# Altium PCB PCB_main.PcbDoc
Units mm, origin at the board's own origin, x right, y up, seen from the top; angles counter-clockwise.
Board outline 50 x 39 mm, 4 copper layers (Top Signal, GND Polygon, Power_Polygon, Bottom Signal), stack 1.174 mm thick; 53 components, 62 nets, 231 pads, 86 vias.
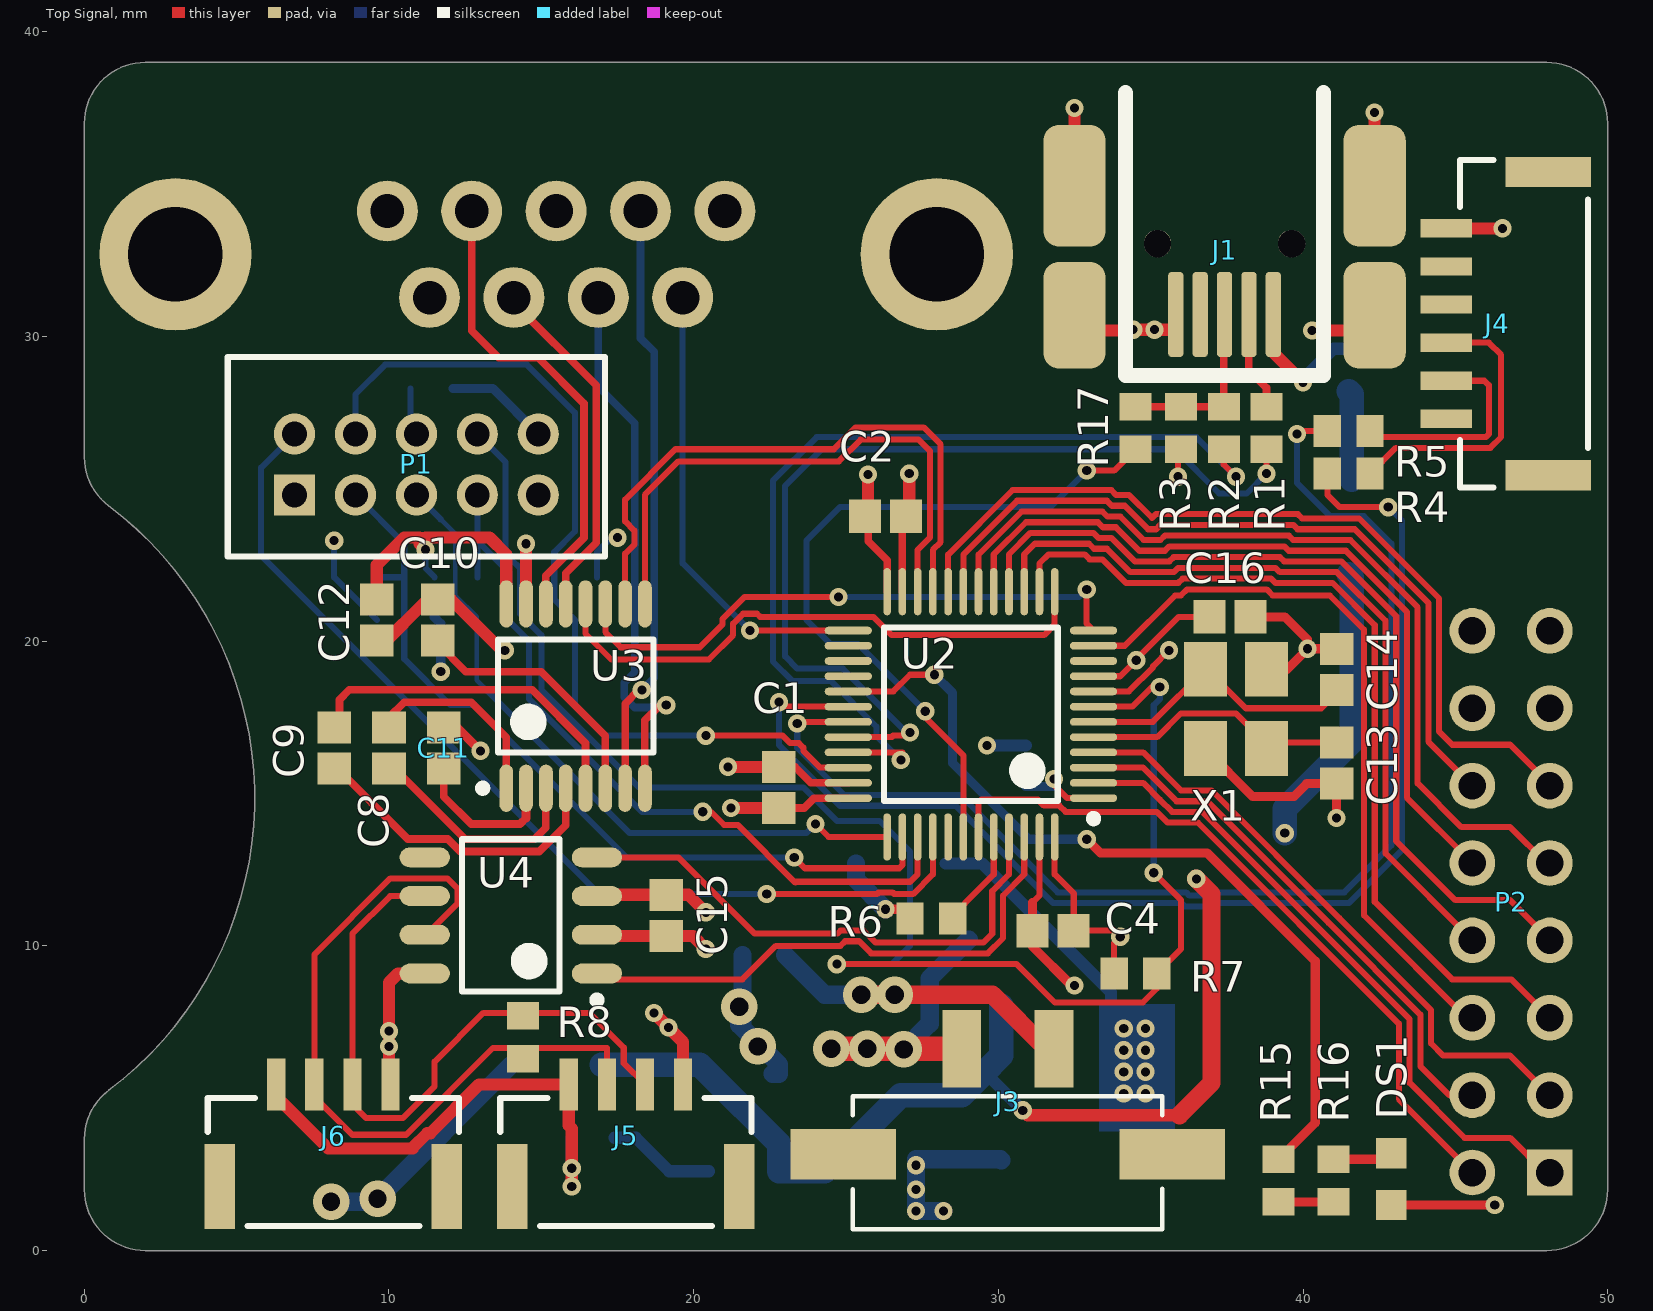
[diagram p0: Top Signal view]
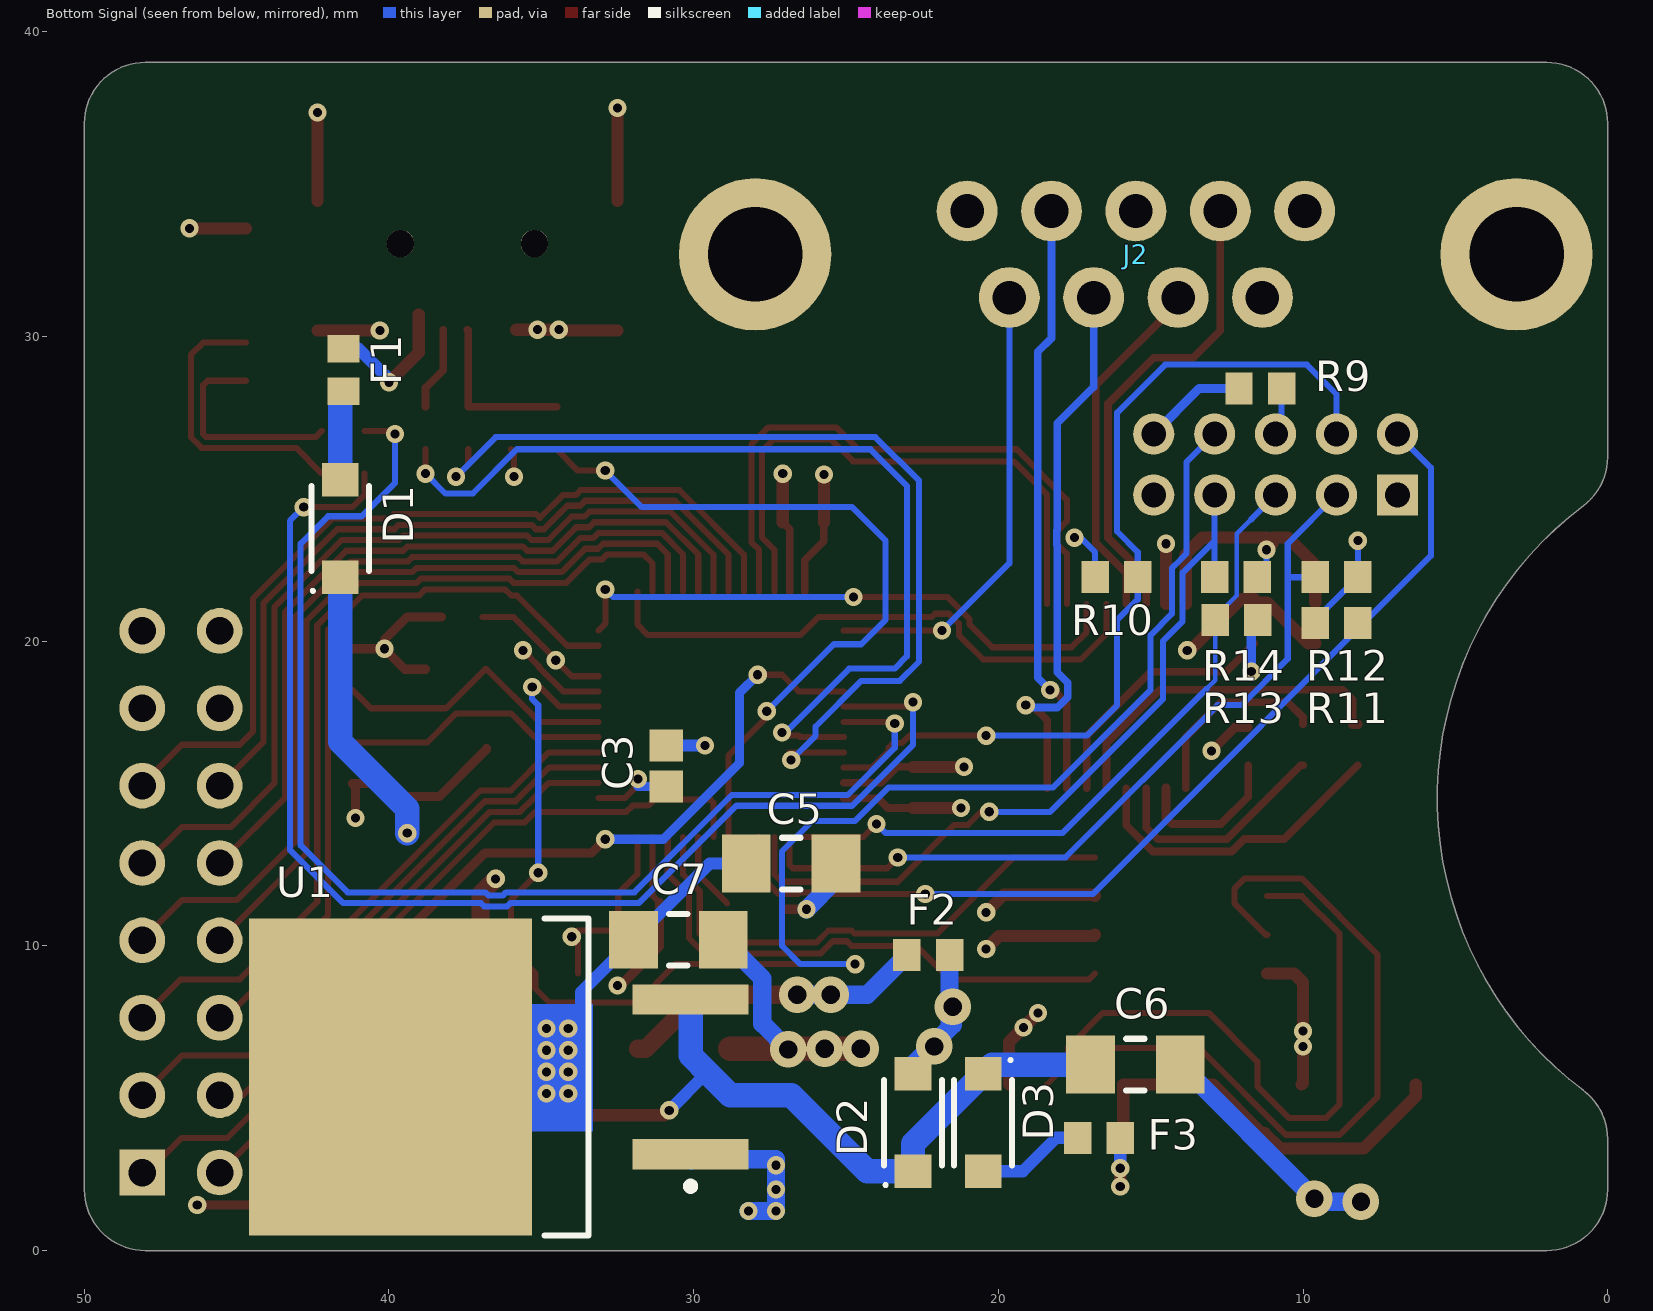
[diagram p1: Bottom Signal view, seen from below]
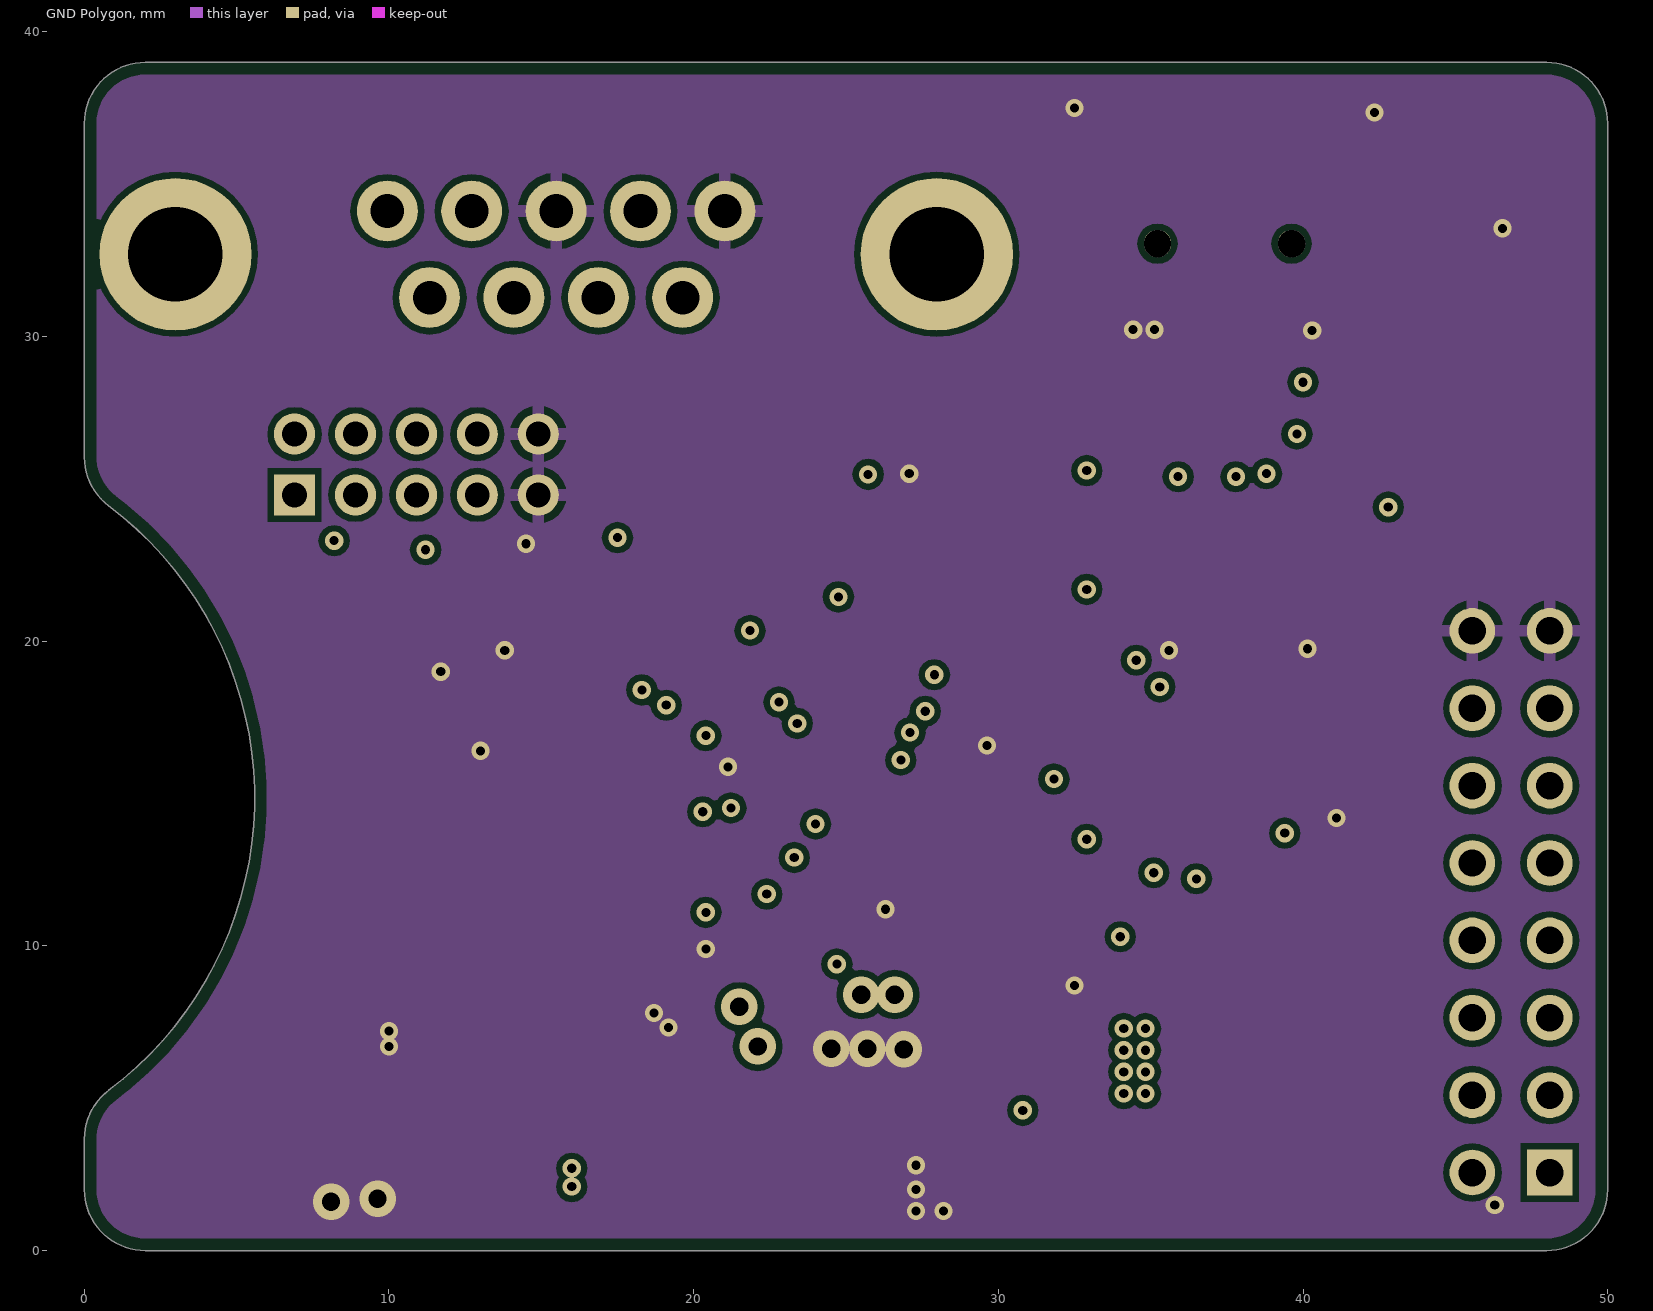
[diagram p2: GND Polygon]
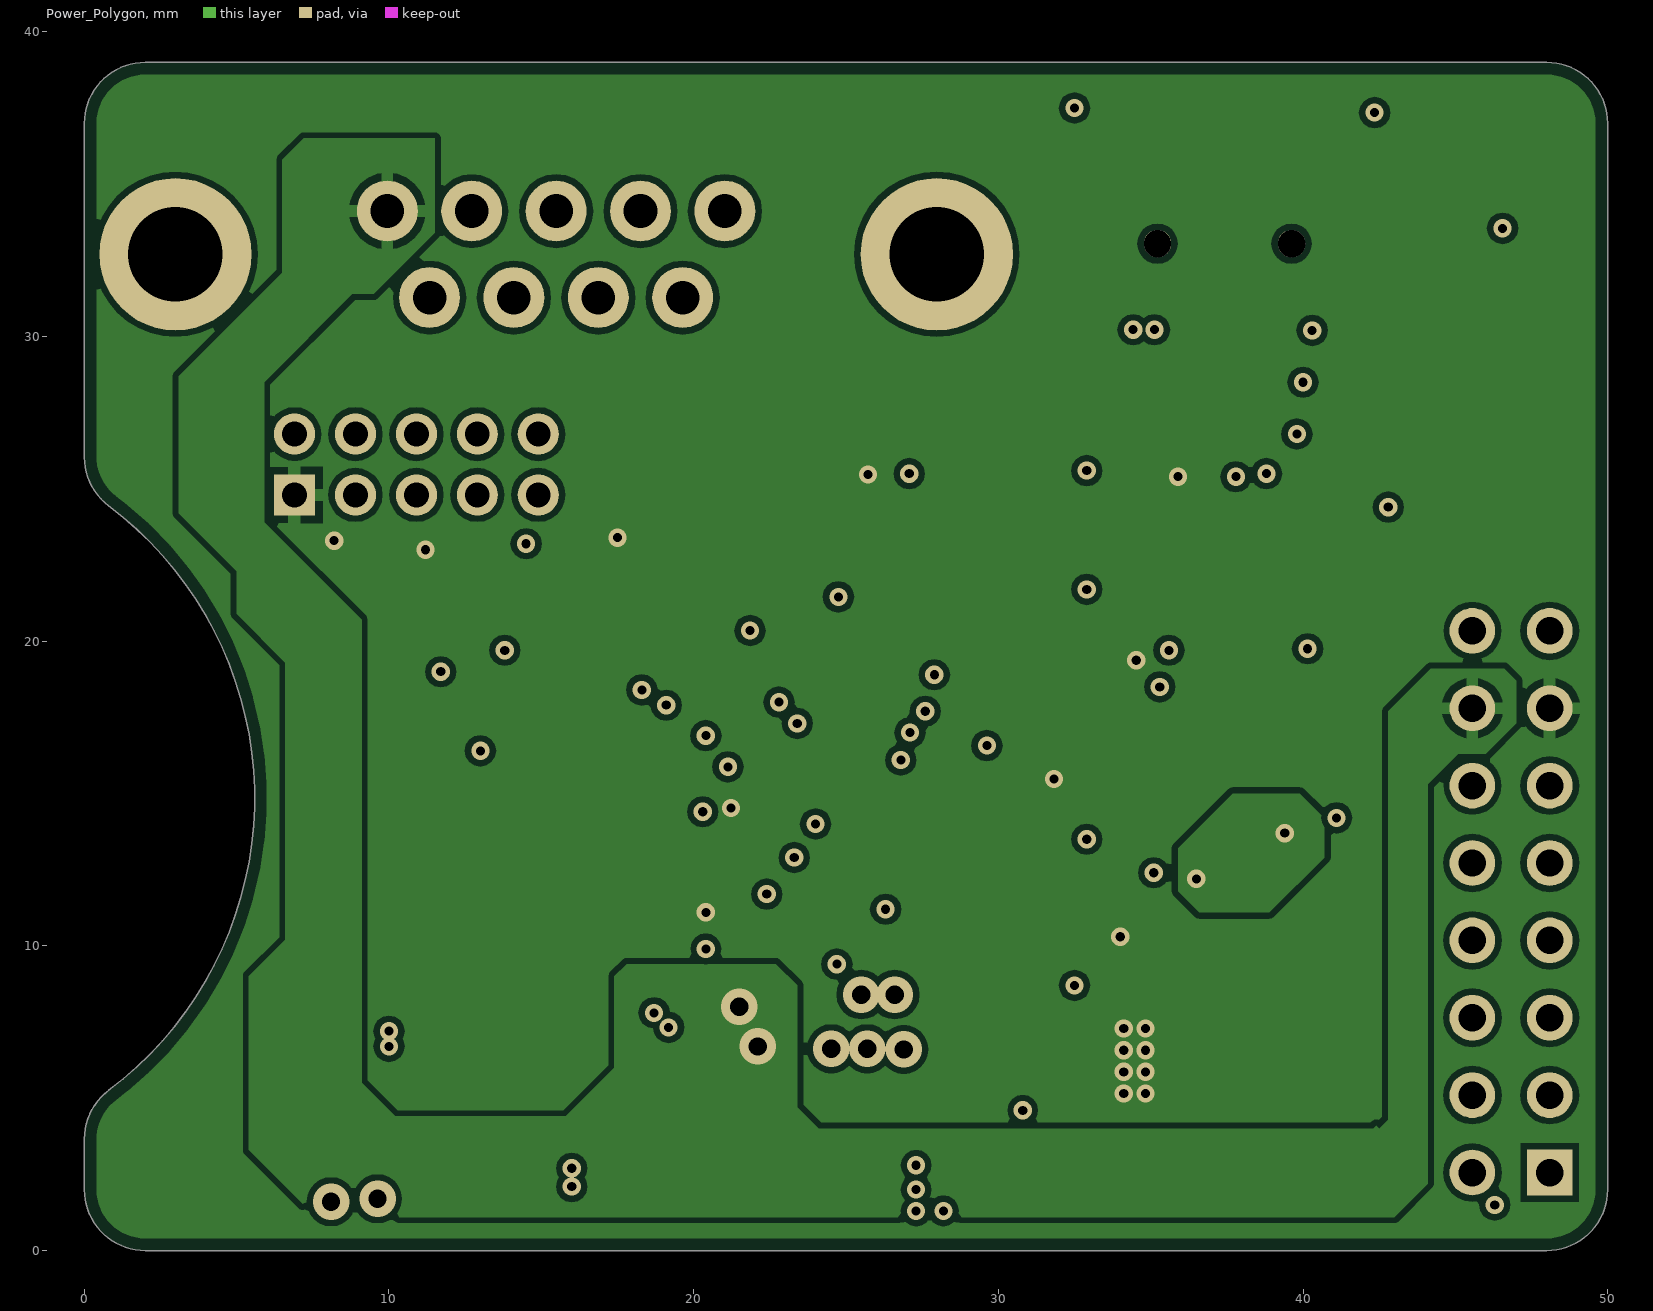
[diagram p3: Power_Polygon]

## Layer stack, top to bottom
Top Solder: solder mask 0.0102, Solder Resist, Dk 3.5
Top Signal: signal copper 0.0356
Dielectric 1: core 0.65, FR-4, Dk 4.8
GND Polygon: signal copper 0.036
Dielectric 3: prepreg 0.127, Dk 4.2
Power_Polygon: signal copper 0.036
Dielectric 4: core 0.254, FR-4, Dk 4.2
Bottom Signal: signal copper 0.0356
Bottom Solder: solder mask 0.0102, Solder Resist, Dk 3.5

## Board outline
0,2 0,3.658 cw(c2,3.658) 0.799,5.256 ccw(c-6.41,14.85) 0.799,24.444 cw(c2,26.042) 0,26.042 0,37 cw(c2,37) 2,39 48,39 cw(c48,37) 50,37 50,2 cw(c48,2) 48,0 2,0 cw(c2,2)

## Design rules (kind name [scope] priority, off if disabled: settings)
BoardOutlineClearance [All] p1: gap=0.4
Clearance [OnLayer('Top Signal') OR OnLayer('Bottom Signal')] p1: gap=0.152
Clearance Clearance_1 [All] p2: gap=0.204
DiffPairsRouting [All] p1: maxlimit=0.254 minlimit=0.152 mostfreqgap=0.2 toplayer_minwidth=0.152 toplayer_maxwidth=0.381 toplayer_prefwidth=0.2 midlayer1_minwidth=0.152 midlayer1_maxwidth=0.381 midlayer1_prefwidth=0.2 midlayer2_minwidth=0.152 midlayer2_maxwidth=0.381 midlayer2_prefwidth=0.2 bottomlayer_minwidth=0.152 bottomlayer_maxwidth=0.381 bottomlayer_prefwidth=0.2 maxuncoupledlength=12.7
HoleSize [All] p1: absolutevalues=TRUE maxlimit=6.35 minlimit=0.3 maxpercent=80.000 minpercent=20.000
HoleToHoleClearance [All] p1: gap=0.2 allowstackedmicrovias=FALSE
MinimumSolderMaskSliver [All] p1: minsoldermaskwidth=0.1
PlaneClearance [All] p1: clearance=0.45
PlaneConnect PlaneConnect_1 [IsStitchingVia] p1: planeconnectstyle=Direct reliefexpansion=0.508 reliefentries=4 reliefconductorwidth=0.254 reliefairgap=0.254
PlaneConnect [All] p2: planeconnectstyle=Relief reliefexpansion=0.3 reliefentries=4 reliefconductorwidth=0.4 reliefairgap=0.2
PolygonConnect PolygonConnect_1 [IsVia] p1: connectstyle=Direct reliefconductorwidth=0.25 reliefentries=4 polygonreliefangle="90 Angle" airgapwidth=0.25
PolygonConnect [All] p2: connectstyle=Relief reliefconductorwidth=0.4 reliefentries=4 polygonreliefangle="90 Angle" airgapwidth=0.25
RoutingVias [All] p1: holewidth=0.3 width=0.6 viastyle="Through Hole" minholewidth=0.3 minwidth=0.5 maxholewidth=6.35 maxwidth=6 viatemplateguid#1={E6714FAC-DE04-47E0-B63F-2598766932E5} viatemplateguid#2={5BBB840E-8C45-4C12-A986-F1D8450A309B} viatemplatename#1=v60h30m0mx0 viatemplatename#2=v120h60m0mx0
SilkToSilkClearance [All] p1: silktosilkclearance=0
SilkToSolderMaskClearance [IsPad] p1: minsilkscreentomaskgap=0.178 clearancetoexposedcopper=TRUE
SolderMaskExpansion SolderMaskExpansion_1 [InComponent('U7')] p1: expansion=0.05
SolderMaskExpansion [All] p2: expansion=0.08
Width [All] p1: maxlimit=6 minlimit=0.152 preferedwidth=0.25 toplayer_prefwidth=0.2 midlayer1_minwidth=0.204 midlayer2_minwidth=0.204 bottomlayer_prefwidth=0.2 minimp=50.000000 maximp=50.000000 favimp=50.000000
22 further rules are at their usual default settings.

## Classes and differential pairs
differential pair CAN: +CAN_P -CAN_N

## Components (designator, comment, footprint, x,y, rotation, side; value= is the part's Value field where it differs from the comment)
C1 "VJ0603Y104JXJPW1BC" 0603C_L 22.8,15.2 r270 top
C2 "VJ0603Y104JXJPW1BC" 0603C_L 26.3,24.1 r180 top
C3 "VJ0603Y104JXJPW1BC" 0603C_L 30.9,15.9 r270 bottom
C4 "VJ0603Y104JXJPW1BC" 0603C_L 31.8,10.5 r0 top
C5 "TMK316B7106KL-TD" 1206_1.6_L 26.8,12.7 r0 bottom
C6 "GRM31CR61H106MA12L" 1206_1.6_L 15.5,6.1 r0 bottom
C7 "TMK316B7106KL-TD" 1206_1.6_L 30.5,10.2 r0 bottom
C8 "GRM188R71H104KA93D" 0603C_L 10,16.5 r90 top
C9 "GRM188R71H104KA93D" 0603C_L 8.2,16.5 r270 top
C10 "GRM188R71H104KA93D" 0603C_L 11.6,20.7 r270 top
C11 "GRM188R71H104KA93D" 0603C_L 11.8,16.5 r270 top
C12 "VJ0603Y104JXJPW1BC" 0603C_L 9.6,20.7 r90 top
C13 "C1608C0G1H020C080AA" 0603C_L 41.1,16 r90 top
C14 "C1608C0G1H020C080AA" 0603C_L 41.1,19.075 r270 top
C15 "VJ0603Y104JXJPW1BC" 0603C_L 19.1,11 r270 top
C16 "VJ0603Y104JXJPW1BC" 0603C_L 37.6,20.8 r180 top
D1 "PMEG3010ER,115" SOD123W_L 41.6,23.7 r90 bottom
D2 "PMEG3010ER,115" SOD123W_L 22.8,4.2 r90 bottom
D3 "PMEG3010ER,115" SOD123W_L 20.5,4.2 r270 bottom
DS1 "APG1608SEKC/T" KING-LED0603-25-ORANGE_V 42.9,2.345 r90 top
F1 "F0603E1R00FSTR" 0603R_0.45_L 41.5,28.9 r90 bottom
F2 "0603SFV350F/32-2" 0603R_0.45_L 22.3,9.7 r0 bottom
F3 "F0603E1R00FSTR" 0603R_0.45_L 16.7,3.7 r0 bottom
J1 "67503-1020" MOLX-67503-1020_V 39.025,30.725 r270 top locked
J2 "D-SUB 9P" 1-1634222-2 15.485,34.12 r180 bottom locked
J3 "43650-0224" 43650-0224 30.3,3.165 r0 top
J4 "BM06B-GHS-TBT(LF)(SN)(N)" BM06B-GHS-TBT 44.7,27.3 r90 top
J5 "BM04B-GHS-TBT(LF)(SN)(N)" BM04B-GHS-TBT 15.902,5.45 r0 top
J6 "BM04B-GHS-TBT(LF)(SN)(N)" BM04B-GHS-TBT 6.3,5.45 r0 top
P1 "LTMM-105-02-TX-D" SMTC-LTMM-105-02-XX-D 6.9,24.8 r0 top
P2 "Header 8X2" HDR2X8 48.1,2.56 r90 top locked
R1 "CRCW060322R0JNEB" 0603R_0.45_L 38.8,27 r90 top
R2 "CRCW060322R0JNEB" 0603R_0.45_L 37.4,27 r90 top
R3 "CRCW06031K50JNEB" 0603R_0.45_L 36,27 r90 top
R4 "CRCW0603100RJNEB" 0603R_0.45_L 41.5,25.5 r180 top
R5 "CRCW0603100RJNEB" 0603R_0.45_L 41.5,26.9 r180 top
R6 "CRCW060310K0JNEB" 0603R_0.45_L 27.8,10.9 r0 top
R7 "CRCW060310K0JNEB" 0603R_0.45_L 34.5,9.1 r0 top
R8 "CRCW0603120RJNEB" 0603R_0.45_L 14.4,7 r270 top
R9 "CRCW060310K0JNEB" 0603R_0.45_L 11.4,28.3 r180 bottom
R10 "CRCW060310K0JNEB" 0603R_0.45_L 16.125,22.1 r180 bottom
R11 "CRCW060310K0JNEB" 0603R_0.45_L 8.9,20.6 r180 bottom
R12 "CRCW060310K0JNEB" 0603R_0.45_L 8.9,22.1 r0 bottom
R13 "CRCW060310K0JNEB" 0603R_0.45_L 12.179,20.7 r0 bottom
R14 "CRCW060310K0JNEB" 0603R_0.45_L 12.2,22.1 r0 bottom
R15 "CRCW0603100RJNEB" 0603R_0.45_L 39.2,2.295 r90 top
R16 "CRCW0603100RJNEB" 0603R_0.45_L 41,2.295 r90 top
R17 "CRCW06031K50JNEB" 0603R_0.45_L 34.5,27 r90 top
U1 "LD1086D2T33TR" TO-263_N 36.4,5.7 r0 bottom
U2 "STM32F103CBT6" STM-LQFP48_L 29.1,17.6 r180 top
U3 "ICL3232IVZ" TSSOP16_L 16.125,18.2 r90 top
U4 "MAX3051ESA+" SOIC8_L 14,11 r180 top
X1 "CRYS 16MHz 9pF" "TSX-3225 16.0000MF09Z-AC3" 37.8,17.78 r270 top

## Footprints (in the part's own frame and the unit in brackets; to place one, negate y for a bottom-side part, rotate by r counter-clockwise, add the part's x,y. Pads: shape width x height; smd on the part's side, far side on the other; paste and mask are expansions set on the pad)
1-1634222-2 [mm] "D-SUB 9P with Inserts"
  round 2 hole 1.1: 1(5.54,0) 2(2.77,0) 3(0,0) 4(-2.77,0) 5(-5.54,0) 6(4.155,-2.84) 7(1.385,-2.84) 8(-1.385,-2.84) 9(-4.155,-2.84)
  round 5 hole 3.1 unplated: 10(12.495,-1.42) 11(-12.495,-1.42)
  body extent -15.4,-7.78 15.4,4.77, height 12.5
0603C_L [mm] "Chip Capacitor, 2-Leads, IPC Low Density"
  rect 1.05x1.1 smd: 1(-0.675,0) 2(0.675,0)
  body extent -0.9,-0.5 0.9,0.5, height 1
0603R_0.45_L [mm] "Chip Resistor, 2-Leads, IPC Low Density"
  rect 0.9x1.05 smd: 1(-0.7,0) 2(0.7,0)
  body extent -0.83,-0.48 0.82,0.48, height 0.5
1206_1.6_L [mm] "Chip Capacitor, 2-Leads, IPC Low Density"
  rect 1.6x1.9 smd: 1(-1.475,0) 2(1.475,0)
  silkscreen extent -0.3,-0.85 0.3,0.85, body extent -1.68,-0.87 1.67,0.87, height 1.8
43650-0224 [mil]
  rect 50x100 smd: 1(60,136) 2(-59.06,136)
  rect 136x65 smd: TAB1(213,0) TAB2(-212.2,0)
  silkscreen extent -200,-97 200,75, body extent -268,-97 270,161, height 392
BM04B-GHS-TBT [mm] "Vertical"
  rect 1x2.8 smd: 0(-1.85,-3.35) 0(5.6,-3.35)
  rect 0.6x1.7 smd: 1(0,0) 2(1.25,0) 3(2.5,0) 4(3.75,0)
  silkscreen extent -2.25,-4.65 6,-0.45, body extent -2.25,-4.68 6,0.27, height 4.18
BM06B-GHS-TBT [mm] "Vertical"
  rect 1x2.8 smd: 0(-1.85,-3.35) 0(8.1,-3.35)
  rect 0.6x1.7 smd: 1(0,0) 2(1.25,0) 3(2.5,0) 4(3.75,0) 5(5,0) 6(6.25,0)
  silkscreen extent -2.25,-4.65 8.5,-0.45, body extent -2.28,-4.65 8.48,0.3, height 3.88
HDR2X8 [mm] "Connector; Header; 8x2 Position"
  rect 1.5x1.5 hole 0.9: 1(0,0)
  round 1.5 hole 0.9 mask+0.05: 2(0,2.54) 4(2.54,2.54) 6(5.08,2.54) 8(7.62,2.54)
  round 1.5 hole 0.9: 3(2.54,0) 5(5.08,0) 7(7.62,0) 9(10.16,0) 10(10.16,2.54) 11(12.7,0) 12(12.7,2.54) 13(15.24,0) 14(15.24,2.54) 15(17.78,0) 16(17.78,2.54)
KING-LED0603-25-ORANGE_V [mm] "LED, SMT, Body 1.6 x 0.8 mm, 0.25mm Thickness"
  rect 1x1 smd paste+0 mask+0: 1(0.85,0) 2(-0.85,0)
  body extent -0.8,-0.4 0.8,0.4, height 0.25
MOLX-67503-1020_V [mm] "Mini USB Connector, SMT, Righer Angle"
  rrect50% 2.8x0.5 smd: 1(0,0) 2(0,-0.8) 3(0,-1.6) 4(0,-2.4) 5(0,-3.2)
  rrect50% 3.5x2.05 smd: 6(0.025,3.325) 8(0.025,-6.525)
  rrect50% 4x2.05 smd: 7(-4.225,3.325) 9(-4.225,-6.525)
  round 0.9 hole 0.9 unplated: X(-2.325,-3.8) Y(-2.325,0.6)
  silkscreen extent -7.27,-4.85 2,1.65, body extent -8.22,-6.56 0.78,3.34, height 3.95
SMTC-LTMM-105-02-XX-D [mm] "Shrouded Header & Stacker, 2x5 Pins, Vertical, 2mm Pitch, Male"
  rect 1.35x1.35 hole 0.81: 1(0,0)
  round 1.35 hole 0.81: 2(0,2) 3(2,0) 4(2,2) 5(4,0) 6(4,2) 7(6,0) 8(6,2) 9(8,0) 10(8,2)
  silkscreen extent -2.19,-2.01 10.19,4.53, body extent -2.19,-2.01 10.19,4.52, height 4.83
SOD123W_L [mm] "SODFL, 2-Leads, Body 1.70x3.50mm, IPC Low Density"
  rect 1.1x1.2 smd: 1(-1.6,0) 2(1.6,0)
  silkscreen extent -2.1,-0.95 1.4,0.95, body extent -2,-0.95 2,0.95, height 1.1
SOIC8_L [mm] "SOIC 8-leads IPC Low density"
  oval 1.65x0.65 smd: 1(-2.825,1.905) 2(-2.825,0.635) 3(-2.825,-0.635) 4(-2.825,-1.905) 5(2.825,-1.905) 6(2.825,-0.635) 7(2.825,0.635) 8(2.825,1.905)
  silkscreen extent -2.95,-2.5 1.6,2.9, body extent -3,-2.5 3,2.5, height 1.75
STM-LQFP48_L [mm] "QFP, 48-Leads, Body 7x7mm, Pitch 0.5mm, IPC High Density"
  oval 1.55x0.25 smd mask+0.05: 1(-4.025,2.75) 2(-4.025,2.25) 3(-4.025,1.75) 4(-4.025,1.25) 5(-4.025,0.75) 6(-4.025,0.25) 7(-4.025,-0.25) 8(-4.025,-0.75) 9(-4.025,-1.25) 10(-4.025,-1.75) 11(-4.025,-2.25) 12(-4.025,-2.75) 25(4.025,-2.75) 26(4.025,-2.25) 27(4.025,-1.75) 28(4.025,-1.25) 29(4.025,-0.75) 30(4.025,-0.25) 31(4.025,0.25) 32(4.025,0.75) 33(4.025,1.25) 34(4.025,1.75) 35(4.025,2.25) 36(4.025,2.75)
  oval 0.25x1.55 smd mask+0.05: 13(-2.75,-4.025) 14(-2.25,-4.025) 15(-1.75,-4.025) 16(-1.25,-4.025) 17(-0.75,-4.025) 18(-0.25,-4.025) 19(0.25,-4.025) 20(0.75,-4.025) 21(1.25,-4.025) 22(1.75,-4.025) 23(2.25,-4.025) 24(2.75,-4.025) 37(2.75,4.025) 38(2.25,4.025) 39(1.75,4.025) 40(1.25,4.025) 41(0.75,4.025) 42(0.25,4.025) 43(-0.25,4.025) 44(-0.75,4.025) 45(-1.25,4.025) 46(-1.75,4.025) 47(-2.25,4.025) 48(-2.75,4.025)
  silkscreen extent -4.15,-2.85 2.85,3.55, body extent -3.5,-3.5 3.5,3.5, height 1.6
TO-263_N [mm] "D2-PAK, 4-Leads, Body 9.2x10.2mm, Pitch 2.54mm, Lead Span 15.4mm, IPC Medium Density"
  rect 3.8x1 smd: 1(-6.3,2.54) 3(-6.3,-2.54)
  rect 9.3x10.4 smd mask+0.05: 4(3.55,0)
  silkscreen extent -6.42,-5.2 -1.5,5.2, body extent -2.95,-5.2 6.4,5.2, height 4.6
TSSOP16_L [mm] "TSOP, 16-Leads, Body 5,00x4,40mm, Pitch 0,65mm, IPC Low Density"
  oval 1.55x0.45 smd mask+0.05: 1(-3.025,2.275) 2(-3.025,1.625) 3(-3.025,0.975) 4(-3.025,0.325) 5(-3.025,-0.325) 6(-3.025,-0.975) 7(-3.025,-1.625) 8(-3.025,-2.275) 9(3.025,-2.275) 10(3.025,-1.625) 11(3.025,-0.975) 12(3.025,-0.325) 13(3.025,0.325) 14(3.025,0.975) 15(3.025,1.625) 16(3.025,2.275)
  silkscreen extent -3.15,-2.55 1.85,3.17, body extent -3.15,-2.55 3.15,2.55, height 1.2
"TSX-3225 16.0000MF09Z-AC3" [mm]
  rect 1.8x1.4 smd: 1(-1.3,-1) 2(1.3,-1) 3(1.3,1) 4(-1.3,1)
  body extent -1.6,-1.25 1.6,1.25, height 0.6

## Part data
C1 C2 C3 C4 C12 C15 C16: "CAP CER 0603 0.1uF 16V X7R 5%"
C5 C7: "CAP CER 1206 10uF 25V X7R 10%"
C6: "CAP CER 1206 10uF 50V X5R 20%"
C8 C9 C10 C11: "CAP CER 0603 0.1uF 50V X7R 10%"
C13 C14: "CAP CER 2pF 0603 50V C0G 12.5%"
D1 D2 D3: "Schottky Diodes & Rectifiers SCHOTTKY DIODE"
DS1: library part CMP-0239-00002-1, "LED, SMT, 0603(1608), 0.25mm Tthickness, Super Bright Orange"
F1 F3: "FUSE 0603 1.0A FAST"
F2: "FUSE 0603 3.5A FAST"
J1: library part CMP-0411-00002-1, "USB, MINI, SMD, RA KME04-USBMU03A01"
J2: library part D-SUB-9P, "Receptacle Header Assemby"
J3: "Headers & Wire Housings MICRO-FIT 3.0 HEADER"
J4: "CONN HEADER GH TOP 6POS 1.25MM"
J5 J6: "CONN HEADER GH TOP 4POS 1.25MM"
P1: library part CMP-1028-00010-1, "Shrouded Header & Stacker, Through-Hole, Vertical, -55 to 105 degC, 2 mm Pitch, 10-Pin, Male, RoHS"
P2: "Header, 8-Pin, Dual row"
R1 R2: "RES 0603 22R 5% 100mW"
R3 R17: "RES 0603 1.5K 5% 100mW"
R4 R5 R15 R16: "RES 0603 100R 5% 100mW"
R6 R7 R9 R10 R11 R12 R13 R14: "RES 0603 10K 5% 100mW"
R8: "RES 0603 120R 5% 100mW"
U1: library part CMP-0244-00124-1, "1.5A, Low Drop Positive Voltage Regulator, 3.3V, 3-Pin D2PAK, Tape and Reel"
U2: library part CMP-0237-00250-3, "ARM Cortex-M3 32-bit MCU, 128 KB Flash, 20 KB Internal RAM, 37 I/Os, 48-pin LQFP, -40 to 85 degC, Tray"
U3: "RS-232 Interface IC RS232 3V 2D/2R IND"
U4: "CAN Interface IC 3.3V 1Mbps Transceiver"
X1: library part "TSX-3225 16.0000MF09Z-AC3", "Crystals 16MHz 10ppm 9pF -20C +75C"

## Via types
v1: diameter 0.6, hole 0.3, Top Signal to Bottom Signal, tented both sides, 77 vias
v2: diameter 1.2, hole 0.6, Top Signal to Bottom Signal, tented both sides, 9 vias

## Nets (pads, with @x,y where several pads share a name; then routed paths per layer and width w, separated by ;. In a path a pad name is that pad's centre, name@x,y a point inside that pad or via, vN(x,y) a via of type N, cw(c..) or ccw(c..) an arc to the next point about the centre after c; other vN are vias at no path point)
3.3V: C1.2 C2.2 C3.2 C4.2 C5.2 C7.2 C12.2 C15.1 C16.2 P1.1 P2.13 R3.1 R7.1 R10.1 R11.1 R12.1 R14.1 U1.4 U2.1 U2.9 U2.24 U2.36 U2.48 U3.16 U4.3 | length 48
  Top Signal w0.2: v1(31.825,15.475) 31.825,15.282 32.257,14.85 U2.1 ; U2.48 31.85,12.35 32.475,11.725 C4.2 33.8,10.5 v1(34,10.3) 33.8,10.1 R7.1 ; U2.9 34,18.85 v1(34.525,19.375) 34.525,19.406 35.919,20.8 C16.2 ; v1@36,25.5 v1(35.9,25.4) 35.9,26.2 R3.1
  Top Signal w0.25: C1.2 23.625,14.525 23.95,14.85 U2.36 ; C2.2@25.725,23.9 25.725,23.275 26.35,22.65 U2.24
  Top Signal w0.4: C12.2@9.6,21.275 C12.2 9.6,22.5 10.5,23.4 11,23.4 11,23.2 v1(11.2,23) ; 11.2,23.4 13.3,23.4 13.85,22.85 U3.16 ; U4.3 16.865,11.675 C15.1 19.825,11.675 v1(20.4,11.1) ; v1(21.225,14.525) C1.2 ; C2.2@25.725,23.9 v1(25.725,25.475)
  Bottom Signal w0.2: v1(8.2,23.3) R12.1 R11.1@9.6,20.7 ; v1(11.2,23) 11.2,22.4 R14.1 ; R10.1 16.825,22.925 v1@17.3,23.4
  Bottom Signal w0.3: C3.2 31.825,15.225 v1(31.825,15.475)
  Bottom Signal w0.4: C5.2 29.475,12.7 C7.2 33.7,8.475 33.7,8
  other v1: 34.116,5.153 34.827,5.153 34.116,5.864 34.827,5.864 34.116,6.575 34.827,6.575 34.116,7.286 34.827,7.286 17.5,23.4
5V_CAN: D3.2 F3.2 | length 3.6
  Bottom Signal w0.4: F3.2 18.1,3.7 19.2,2.6 D3.2
AUX1: P2.1 U2.2 | length 21.5
  Top Signal w0.2: U2.2 34.752,15.35 35.3,14.802 35.302,14.802 35.708,14.395 36.7,14.395 43.5,7.595 43.5,5.5 45.3,3.7 46.8,3.7 47.94,2.56 P2.1
AUX2: P2.4 U2.3 | length 17.9
  Top Signal w0.2: U2.3 34.75,15.85 35.4,15.2 35.402,15.2 35.854,14.748 36.852,14.748 40.84,10.76 40.84,10.754 43.852,7.741 43.852,6.048 44.8,5.1 P2.4
AUX3: P2.3 U2.4 | length 20.3
  Top Signal w0.2: U2.4 34.75,16.35 36,15.1 37,15.1 41.192,10.908 41.192,10.9 44.205,7.887 44.205,6.795 44.6,6.4 46.8,6.4 P2.3
AUX4: P2.2 U2.43 | length 23.9
  Top Signal w0.2: U2.43 29.35,14.7 29.45,14.8 31.3,14.8 31.498,14.602 32.006,14.602 32.209,14.4 35.205,14.4 35.562,14.043 36.554,14.043 43.148,7.449 43.148,4.972 P2.2
AUX5: P2.6 U2.11 | length 24.5
  Top Signal w0.2: U2.11 34.15,19.85 35.8,21.5 35.993,21.5 36.195,21.702 38.805,21.702 39.007,21.5 40.882,21.5 42.002,20.38 42.002,11 45.362,7.64 P2.6
AUX6: P2.5 U2.14 | length 29.5
  Top Signal w0.2: U2.14 31.35,22.55 31.648,22.848 32.83,22.848 32.995,22.683 33.417,22.683 34.188,21.912 35.907,21.912 36.049,22.055 38.951,22.055 39.093,21.912 40.968,21.912 42.355,20.526 42.355,11.445 44.9,8.9 46.84,8.9 P2.5
AUX7: P2.8 U2.15 | length 26.1
  Top Signal w0.2: U2.15 30.85,22.85 31.2,23.2 32.976,23.2 33.141,23.036 33.564,23.036 34.335,22.265 35.761,22.265 35.904,22.407 39.096,22.407 39.239,22.265 41.114,22.265 42.707,20.671 42.707,13.033 P2.8
AUX8: P2.7 U2.16 | length 29.3
  Top Signal w0.2: U2.16 30.35,22.848 31.054,23.552 33.122,23.552 33.287,23.388 33.71,23.388 34.481,22.617 35.615,22.617 35.758,22.76 39.242,22.76 39.385,22.617 41.26,22.617 43.06,20.817 43.06,13.44 45,11.5 46.8,11.5 48.1,10.2 P2.7
AUX9: P2.10 U2.17 | length 25.7
  Top Signal w0.2: U2.17 29.85,22.847 30.908,23.905 33.268,23.905 33.433,23.74 33.856,23.74 34.627,22.97 35.469,22.97 35.612,23.112 39.388,23.112 39.531,22.97 41.406,22.97 43.412,20.963 43.412,14.868 P2.10
AUX10: P2.9 U2.18 | length 28.8
  Top Signal w0.2: U2.18 29.35,22.845 30.762,24.257 33.414,24.257 33.579,24.093 34.002,24.093 34.773,23.322 35.323,23.322 35.466,23.464 39.534,23.464 39.677,23.322 41.552,23.322 43.764,21.109 43.764,15.336 45.2,13.9 46.8,13.9 47.98,12.72 P2.9
AUX11: P2.12 U2.19 | length 25.3
  Top Signal w0.2: U2.19 28.85,22.843 30.616,24.61 33.56,24.61 33.724,24.445 34.148,24.445 34.919,23.674 35.177,23.674 35.32,23.817 39.68,23.817 39.823,23.674 41.698,23.674 44.117,21.255 44.117,16.703 P2.12
AUX12: P2.11 U2.20 | length 28.6
  Top Signal w0.2: U2.20 28.35,22.842 30.47,24.962 33.706,24.962 33.87,24.798 34.294,24.798 35.048,24.044 35.174,24.169 39.826,24.169 39.969,24.027 41.844,24.027 44.469,21.401 44.469,17.031 44.9,16.6 46.8,16.6 48.1,15.3 P2.11
BOOT0: R6.2 U2.44 | length 2.6
  Top Signal w0.2: R6.2@28.9,11.398 29.85,12.348 U2.44
CAN_N: J5.3 J6.3 R8.1 U4.6 | length 21.5
  Top Signal w0.2: U4.6 10.035,11.635 8.8,10.4 J6.3 8.8,4.8 9.252,4.348 10.455,4.348 11.5,5.393 11.5,6.2 13.1,7.8 16.566,7.8 17.705,6.661 17.705,6.148 J5.3
CAN_P: J5.2 J6.2 R8.2 U4.7 | length 25
  Top Signal w0.2: U4.7 11.222,10.365 12.252,11.396 12.252,11.874 11.914,12.212 10.047,12.212 7.55,9.716 J6.2 7.55,5.05 8.8,3.8 10.562,3.8 13.409,6.648 17.152,6.648 J5.2
CAN_RX: U2.45 U4.4 | length 17.7
  Top Signal w0.2: U4.4 19.495,12.905 22,10.4 24.72,10.4 24.825,10.505 25.575,10.505 25.975,10.105 29.506,10.105 29.8,10.398 29.8,11.8 30.35,12.35 U2.45
CAN_TX: U2.46 U4.1 | length 17.9
  Top Signal w0.2: U4.1 17.02,8.9 21.6,8.9 22.7,10 24.819,10 24.971,10.152 25.429,10.152 25.829,9.752 29.652,9.752 30.152,10.252 30.152,11.652 30.85,12.35 U2.46
DEBUG_JTCK: P1.5 R13.2 U2.37 | length 22.7
  Top Signal w0.2: v1(24,14) 24.425,13.575 U2.37
  Bottom Signal w0.152: 11.7,24 12.179,23.521 12.179,21.5 12.879,20.8 R13.2 12.879,18.721 13.15,18.45
  Bottom Signal w0.2: P1.5 11.7,24 ; 13.15,18.45 17.9,13.7 23.7,13.7 v1(24,14)
DEBUG_JTDI: P1.3 R12.2 U2.38 | length 27.1
  Top Signal w0.2: v1(23.3,12.9) 23.652,12.548 26.748,12.548 26.85,12.65 U2.38
  Bottom Signal w0.2: P1.3 10.5,23.2 10.5,22.1 ; R12.2 10.5,22.1 ; v1(23.3,12.9) 17.8,12.9 12.8,17.9 12.019,17.9 10.5,19.419 10.5,22.1
DEBUG_JTDO: P1.7 R14.2 U2.39 | length 25.2
  Top Signal w0.2: v1(20.3,14.4) 20.569,14.4 20.996,13.973 21.446,13.973 23.341,12.077 23.369,12.105 27.105,12.105 27.35,12.35 U2.39
  Bottom Signal w0.2: R14.2 12.9,23.3 ; P1.7 12.9,23.3 ; v1(20.3,14.4) 18.3,14.4 14.6,18.1 14.6,20 13.95,20.65 13.95,22.25 12.9,23.3
DEBUG_JTMS: P1.4 R10.2 U2.34 | length 29.6
  Top Signal w0.2: v1(20.4,16.9) 22.919,16.9 23.166,16.652 23.455,16.652 23.602,16.505 23.602,16.398 24.15,15.85 U2.34
  Bottom Signal w0.2: P1.4 8.9,28.1 9.877,29.077 14.523,29.077 16.1,27.5 16.1,23.6 15.425,22.925 R10.2 15.425,21.375 16.1,20.7 16.1,17.9 17.1,16.9 v1(20.4,16.9)
DEBUG_NJTRST: P1.2 R11.2 U2.40 | length 32.8
  Top Signal w0.2: v1@22.5,11.6 v1(22.4,11.7) 26.019,11.7 26.071,11.752 26.529,11.752 26.581,11.7 27.2,11.7 27.85,12.35 U2.40
  Bottom Signal w0.2: P1.2 5.8,25.7 5.8,22.8 16.9,11.7 v1(22.4,11.7)
GND: C1.1 C2.1 C3.1 C4.1 C5.1 C6.1 C7.1 C10.1 C11.1 C12.1 C13.1 C14.1 C15.2 C16.1 DS1.2 J1.5 J1.6 J1.7 J1.8 J1.9 J2.3 J2.5 J3.2 J4.6 J5.4 J6.4 P1.9 P1.10 P2.15 P2.16 R6.1 R9.1 R13.1 U1.1 U2.8 U2.23 U2.35 U2.47 U3.15 U4.2 U4.8 X1.2 X1.4 | length 96.4
  Top Signal w0.2: 31.125,11.425 31.35,11.65 U2.47 ; U2.8 34.281,18.35 35.077,19.146 35.077,19.177 v1(35.6,19.7)
  Top Signal w0.25: C1.1 23.325,15.875 23.85,15.35 U2.35 ; U2.23 26.85,23.675 C2.1@27.075,23.9
  Top Signal w0.3: C11.1 12.225,17.175 v1(13,16.4) ; v1(26.3,11.2) R6.1@27,11.2 ; 31.125,11.425 C4.1 31.125,9.975 32.4,8.7 v1(32.5,8.7) ; X1.2 36.8,16.452 38.352,14.9 39.7,14.9 40.125,15.325 41.2,15.325 41.1,15.225 v1(41.1,14.2) ; C16.1 39.4,20.8 40.15,20.05 v1(40.15,19.75) ; X1.4 39.48,19.08 v1(40.15,19.75) ; C14.1@41.2,19.75 C14.1 v1(40.15,19.75) ; DS1.2 v1(46.295,1.495)
  Top Signal w0.4: C12.1@9.6,19.925 9.823,19.925 11.173,21.275 C10.1@11.6,21.275 ; J6.4 10,5.5 v1(10,6.7) 10,8.8 10.295,9.095 U4.8 ; C10.1 12.025,21.375 13.7,19.7 v1(13.8,19.7) ; U3.15 v1(14.5,23.2) ; U4.2 16.865,10.325 C15.2 19.975,10.325 v1(20.4,9.9) ; v1(18.7,7.8) 19.652,6.848 J5.4 ; v1(21.125,15.875) C1.1 ; C2.1@27.075,23.9 v1(27.075,25.5) ; J1.8@32.5,30.2 34.4,30.2 v1(34.425,30.225) v1(35.125,30.225) J1.5@35.825,30.225 ; J1.9@32.5,34.45 v1(32.5,37.5) ; v1(40.3,30.2) J1.6@42.35,30.2 ; J1.7@42.35,34.45 v1(42.35,37.35) ; J4.6 v1(46.55,33.55)
  Top Signal w0.8: v2(24.519,6.619) v2(25.7,6.619) J3.2
  Bottom Signal w0.2: v1@35.6,19.669 v1(35.6,19.7)
  Bottom Signal w0.3: R13.1@11.479,20.8 11.7,20.579 v1(11.7,19) v1@11.8,18.9 ; R9.1 13.4,28.3 P1.10
  Bottom Signal w0.4: v1(29.625,16.575) C3.1
  Bottom Signal w0.6: v2(8.1,1.6) 9.525,1.6 v2(9.625,1.7) C6.1 ; C5.1 25.325,12.175 v1(26.3,11.2) ; v2(26.9,6.6) 27.748,7.448 27.748,8.927 29.02,10.2 C7.1 ; v1(28.2,1.3) v1(27.3,1.3) v1(27.3,2) v1(27.3,2.8) 27.3,3 30.06,3 U1.1@30.1,2.96
  other v1: 10,7.2 19.176,7.324
NetC8_1: C8.1 U3.3 | length 7.6
  Top Signal w0.25: C8.1@10,15.925 10.076,15.925 12.501,13.5 14.769,13.5 15.15,13.881 U3.3
NetC8_2: C8.2 U3.1 | length 6.4
  Top Signal w0.25: C8.2@10,17.275 10,17.5 10.5,18 12.7,18 13.85,16.85 U3.1
NetC9_1: C9.1 U3.5 | length 11.4
  Top Signal w0.25: C9.1@8.375,17.275 8.375,18.075 8.702,18.402 14.698,18.402 16.45,16.65 U3.5
  Top Signal w0.3: C9.1@8.2,17.275 C9.1@8.375,17.275
NetC9_2: C9.2 U3.4 | length 10.3
  Top Signal w0.25: C9.2@8.2,15.925 10.618,13.507 11.925,13.507 12.334,13.098 14.936,13.098 15.8,13.962 U3.4
NetC10_2: C10.2 U3.6 | length 8.5
  Top Signal w0.25: C10.2@11.6,19.925 12.525,19 15,19 17.1,16.9 U3.6
NetC11_2: C11.2 U3.2 | length 5.2
  Top Signal w0.25: C11.2@11.8,15.925 C11.2 11.8,14.9 12.7,14 14.3,14 14.5,14.2
  Top Signal w0.3: 14.5,14.2 U3.2
NetC13_2: C13.2 U2.5 X1.3 | length 8.8
  Top Signal w0.2: U2.5 35.213,16.85 35.995,17.632 37.792,17.632 38.75,16.675 C13.2 C13.2@41.2,16.675
NetC14_2: C14.2 U2.6 X1.1 | length 9.6
  Top Signal w0.2: U2.6 35.07,17.35 X1.1 36.843,19.08 38.123,17.8 40.6,17.8 C14.2@41.2,18.4
NetDS1_1: DS1.1 R16.2 | length 2
  Top Signal w0.3: R16.2 42.7,2.995 DS1.1
NetF1_2: F1.2 J1.1 | length 4.6
  Top Signal w0.4: J1.1 39.025,29.475 v1(40,28.5)
  Bottom Signal w0.4: v1(40,28.5) 40,28.6 41,29.6 F1.2
NetF2_2: F2.2 J3.1 | length 11.2
  Top Signal w0.6: v2(25.5,8.4) v2(26.6,8.4) 29.8,8.4 31.581,6.619 J3.1
  Bottom Signal w0.6: F2.2 24.3,8.4 v2(25.5,8.4) v2(26.6,8.4)
NetF3_1: F3.1 J5.1 J6.1 | length 16
  Top Signal w0.4: J6.1 6.3,5.052 8.004,3.348 10.783,3.348 10.783,3.381 11.254,3.852 11.358,3.852 12.955,5.45 J5.1 15.9,5.448 15.9,4.1 16,4 v1(16,2.7) v1(16,2.1)
  Bottom Signal w0.4: v1(16,2.7) F3.1
NetJ1_2: J1.2 R1.2 | length 2.8
  Top Signal w0.25: J1.2@38.225,30.225 38.225,28.9 38.8,28.325 R1.2
NetJ1_3: J1.3 R2.2 R3.2 R17.2 | length 5.4
  Top Signal w0.25: R17.2 R3.2 R2.2 37.4,30.2 J1.3@37.425,30.225
NetR4_2: R4.2 U2.30 | length 41.5
  Top Signal w0.2: v1(22.8,18) 22.95,17.85 23.169,17.85 23.171,17.852 25.073,17.852 U2.30 ; R4.2 40.8,24.8 41.2,24.4 v1(42.8,24.4)
  Bottom Signal w0.2: v1(22.8,18) 22.8,16.6 24.8,14.6 28.6,14.6 31.798,11.402 36.018,11.402 36.125,11.295 36.875,11.295 36.982,11.402 41.501,11.402 43.252,13.154 43.252,23.948 v1(42.8,24.4)
NetR5_2: R5.2 U2.31 | length 41.2
  Top Signal w0.2: v1(23.4,17.3) 23.45,17.35 U2.31 ; v1(39.8,26.8) 39.9,26.9 R5.2
  Bottom Signal w0.2: v1(23.4,17.3) 23.4,16.499 24.946,14.952 28.746,14.952 31.944,11.755 36.164,11.755 36.271,11.648 36.729,11.648 36.836,11.755 41.355,11.755 42.9,13.3 42.9,23.2 42,24.1 40.9,24.1 39.8,25.2 v1(39.8,26.8)
NetR15_1: R15.1 R16.1 | length 1.8
  Top Signal w0.3: R15.1 R16.1
NRST: P1.8 R7.2 U2.7 | length 53.7
  Top Signal w0.2: v1(24.7,9.4) 30.6,9.4 31.858,8.142 34.742,8.142 35.2,8.6 R7.2 36,9.9 36,11.5 v1(35.1,12.4) ; U2.7 34.398,17.85 35.148,18.6 35.248,18.5 v1(35.3,18.5)
  Bottom Signal w0.2: P1.8 13.827,25.873 13.827,22.873 14,22.7 14,22.698 14.302,22.396 14.302,20.898 15,20.2 15,18.4 18.2,15.2 23.6,15.2 24.7,14.1 26.1,14.1 27.1,13.1 27.1,10 26.5,9.4 v1(24.7,9.4) ; v1(35.1,12.4) 35.1,17.9 35.3,18.1 v1(35.3,18.5)
RS232A_TCMD: J2.2 U3.14 | length 15.7
  Top Signal w0.25: J2.2 12.715,30.185 13.6,29.3 14.9,29.3 16.4,27.8 16.4,23.4 15.15,22.15 U3.14
RS232A_TSTAT: J2.7 U3.13 | length 11.6
  Top Signal w0.25: J2.7 14.1,31.1 16.802,28.398 16.802,23.233 15.8,22.231 U3.13
RS232B_ALTITUDE_IN: J2.4 U3.7 | length 19.6
  Top Signal w0.25: U3.7 17.75,17.95 18.2,18.4 v1(18.3,18.4)
  Bottom Signal w0.25: J2.4 18.255,29.945 18.7,29.5 18.7,18.8 v1(18.3,18.4)
RS232B_ALTITUDE_OUT: J2.8 U3.8 | length 18.4
  Top Signal w0.25: U3.8 18.4,17.4 18.9,17.9 v1(19.1,17.9)
  Bottom Signal w0.25: J2.8 16.87,28.344 18.061,27.153 18.061,23.656 18.077,23.639 18.077,23.161 18.061,23.144 18.061,18.977 17.723,18.639 17.723,18.161 18.061,17.823 19.023,17.823 v1(19.1,17.9)
RTCK: P1.6 R9.2 | length 1.6
  Bottom Signal w0.2: R9.2 10.7,27 P1.6
STATUS_LED: R15.2 U2.29 | length 27.8
  Top Signal w0.2: U2.29 26.55,18.35 27.1,18.9 v1(27.9,18.9)
  Top Signal w0.3: v1(32.9,13.5) 33.348,13.052 36.848,13.052 40.4,9.5 40.4,4.195 R15.2
  Bottom Signal w0.3: v1(27.9,18.9) 28.5,18.3 28.5,16 31,13.5 v1(32.9,13.5)
TRANS_SUPPRESSION: J2.9 U2.25 | length 15.1
  Top Signal w0.2: v1(21.85,20.35) U2.25
  Bottom Signal w0.2: J2.9 19.64,22.56 v1(21.85,20.35)
USART1_RX: J4.2 R5.1 | length 7.1
  Top Signal w0.2: R5.1 42.4,26.7 46,26.7 46.1,26.8 46.1,28.4 45.95,28.55 J4.2
USART1_TX: J4.3 R4.1 | length 9.5
  Top Signal w0.2: R4.1 43.048,26.348 46.146,26.348 46.498,26.7 46.5,26.7 46.5,29.4 46.1,29.8 J4.3
USART2_RX: U2.13 U3.12 | length 19.1
  Top Signal w0.2: U3.12 16.45,20.25 17.3,19.4 20.5,19.4 21.298,20.198 21.298,20.579 21.621,20.902 22.079,20.902 22.181,20.8 25.9,20.8 26.5,20.2 31.5,20.2 31.85,20.55 U2.13
USART2_TX: U2.12 U3.11 | length 19.3
  Top Signal w0.2: U3.11 17.1,20.3 17.6,19.8 20.2,19.8 20.945,20.545 20.945,20.725 21.673,21.452 v1(24.752,21.452) ; v1(32.9,21.7) 32.9,20.575 U2.12
  Bottom Signal w0.2: v1(24.752,21.452) 32.652,21.452 v1(32.9,21.7)
USART3_RX: U2.22 U3.9 | length 18.6
  Top Signal w0.2: U3.9 18.4,23.02 18.405,23.025 18.405,23.775 18.4,23.78 18.4,24.8 19.5,25.9 24.766,25.9 25.483,26.617 27.383,26.617 27.752,26.248 27.752,23.4 27.35,22.998 U2.22
USART3_TX: U2.21 U3.10 | length 20.2
  Top Signal w0.2: U3.10 17.75,22.869 18.052,23.171 18.052,23.629 17.75,23.931 17.75,24.648 19.402,26.3 24.6,26.3 25.317,27.017 27.549,27.017 28.105,26.461 28.105,23.254 27.85,22.999 U2.21
USB_DM: R1.1 U2.32 | length 30.9
  Top Signal w0.2: U2.32 26.501,16.85 26.551,16.9 27,16.9 v1(27.1,17) v1@27.2,17.1 ; v1(38.8,25.5) R1.1
  Bottom Signal w0.2: v1(27.1,17) 27,17 24.9,19.1 23.4,19.1 23,19.5 23,25.1 24.2,26.3 35.8,26.3 37.252,24.848 38.148,24.848 v1(38.8,25.5)
USB_DP: R2.1 U2.33 | length 31.2
  Top Signal w0.2: U2.33 26.85,16.35 26.7,16.2 v1(26.8,16.1) ; R2.1 37.4,25.8 v1(37.8,25.4)
  Bottom Signal w0.2: v1(26.8,16.1) 26,16.9 26,17.2 24.5,18.7 23.234,18.7 22.6,19.334 22.6,25.266 24.034,26.7 36.5,26.7 v1(37.8,25.4)
USB_PULL_UP: R17.1 U2.42 | length 24.4
  Top Signal w0.2: v1(27.6,17.7) 27.6,17.5 28.85,16.25 U2.42 ; v1(32.9,25.6) 33.8,25.6 R17.1
  Bottom Signal w0.2: v1(27.6,17.7) 25.4,19.9 24.5,19.9 23.7,20.7 23.7,23.3 24.8,24.4 31.7,24.4 v1(32.9,25.6)
V_IN: D2.2 F2.1 J2.1 P2.14 | length 5.2
  Bottom Signal w0.6: v2(21.5,8) 21.5,7.4 22.8,6.1 D2.2 D2.2@22.6,5.8 ; 21.6,7.4 F2.1
  other v2: 22.1,6.7
V_MCU: C6.2 D1.1 D2.1 D3.1 U1.3 | length 43.2
  Top Signal w0.4: v1(30.8,4.6) 30.957,4.443 35.943,4.443
  Top Signal w0.6: 35.943,4.443 37,5.5 37,11.7 v1(36.5,12.2)
  Bottom Signal w0.4: 29.5,5.8 29.6,5.8 v1(30.8,4.6)
  Bottom Signal w0.8: C6.2 20.2,6.1 D3.1 22.8,3.5 D2.1 24.3,2.6 26.8,5.1 28.8,5.1 29.5,5.8 30.1,6.4 U1.3@30.1,8.04 ; v1(39.4,13.7) 39.4,14.5 41.6,16.7 D1.1 D1.1@41.5,22.2
V_USB: D1.2 F1.1 | length 2.9
  Bottom Signal w0.8: F1.1 41.6,28.1 D1.2
pads on no net: J1.4 J1.X J1.Y J2.6 J2.10 J2.11 J3.TAB1 J3.TAB2 J4.0 J4.1 J4.4 J4.5 J5.0 J6.0 U2.10 U2.26 U2.27 U2.28 U2.41 U4.5

## Polygon pours and split planes (outlines as drawn)
GND on GND Polygon "GND_L02_P-001" (solid, pour order 0): 0,39 0,0 49.9,0 50,0.1 50,39
3.3V on Power_Polygon "GND_L02_P-001" (solid, pour order 6): 0,39 0,0 50,0 50,39
V_MCU on Power_Polygon "GND_L02_P-001" (solid, pour order 4): 37.7,15 35.9,13.2 35.9,11.8 36.6,11.1 38.9,11.1 40.7,12.9 40.7,14.2 39.9,15
V_IN on Power_Polygon "GND_L02_P-001" (solid, pour order 2): 11.5,36.5 7.2,36.5 6.5,35.8 6.5,32.1 3.1,28.7 3.1,28.2 3.1,24.2 5,22.3 5,20.9 6.6,19.3 6.6,10.2 5.4,9 5.4,3.3 7.6,1.1 43,1.1 44.1,2.2 44.1,15.1 44.1,15.3 45.1,16.3 46,16.3 47,17.3 47,18.7 46.6,19.1 44.2,19.1 42.8,17.7 42.8,4.3 42.5,4 42.4,4.1 42.3,4 24.1,4 23.4,4.7 23.4,8.7 22.7,9.4 17.8,9.4 17.4,9 17.4,6 15.8,4.4 10.2,4.4 9.1,5.5 9.1,20.7 5.9,23.9 5.9,28.5 8.8,31.4 9.5,31.4 11.5,33.4 11.5,36.5

## Other copper
Bottom Signal:
  rectangle net 3.3V: 33.3,3.9 35.8,8.1

## Silkscreen, mask and mechanical layers (free items; w line width, h text height)
Board outline:
  the board outline again, w0.2
DXF:
  circle w0.2: c27.99,32.7 r1.55
  circle w0.2: c3,32.7 r1.55
  lines w0.2: 0,2 ccw(c2,2) 2,0 48,0 ccw(c48,2) 50,2 50,37 ccw(c48,37) 48,39 2,39 ccw(c2,37) 0,37 0,26.042 ccw(c2,26.042) 0.799,24.444 cw(c-6.41,14.85) 0.799,5.256 ccw(c2,3.658) 0,3.658 0,2

## Dimensions
48,39 to 48,0 on Dimensions
0,26.042 to 50,37 on Dimensions